# Altium PCB PCB2.PcbDoc
Units mil, origin at the board's own origin, x right, y up, seen from the top; angles counter-clockwise.
Board outline 3346.46 x 866.75 mil, 2 copper layers (Top Layer, Bottom Layer); 13 components, 12 nets, 38 pads, 32 vias.
Unrouted connection lines stored in the file: 8.
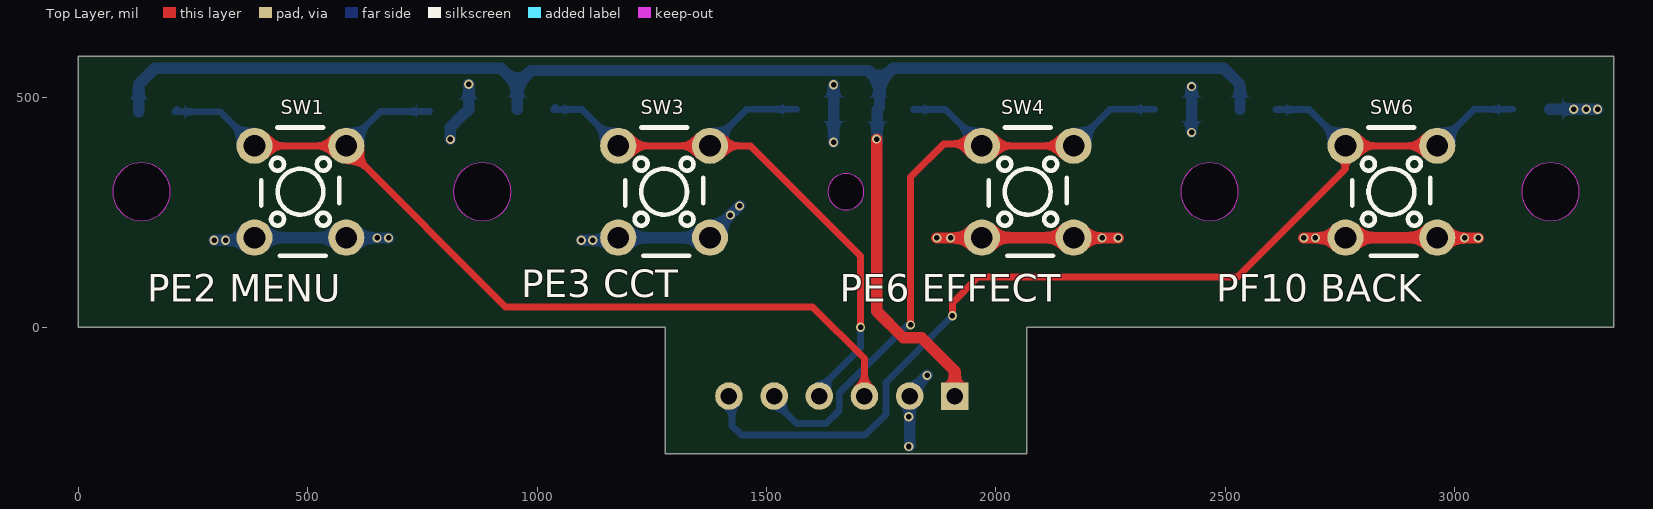
[diagram p0: Top Layer view]
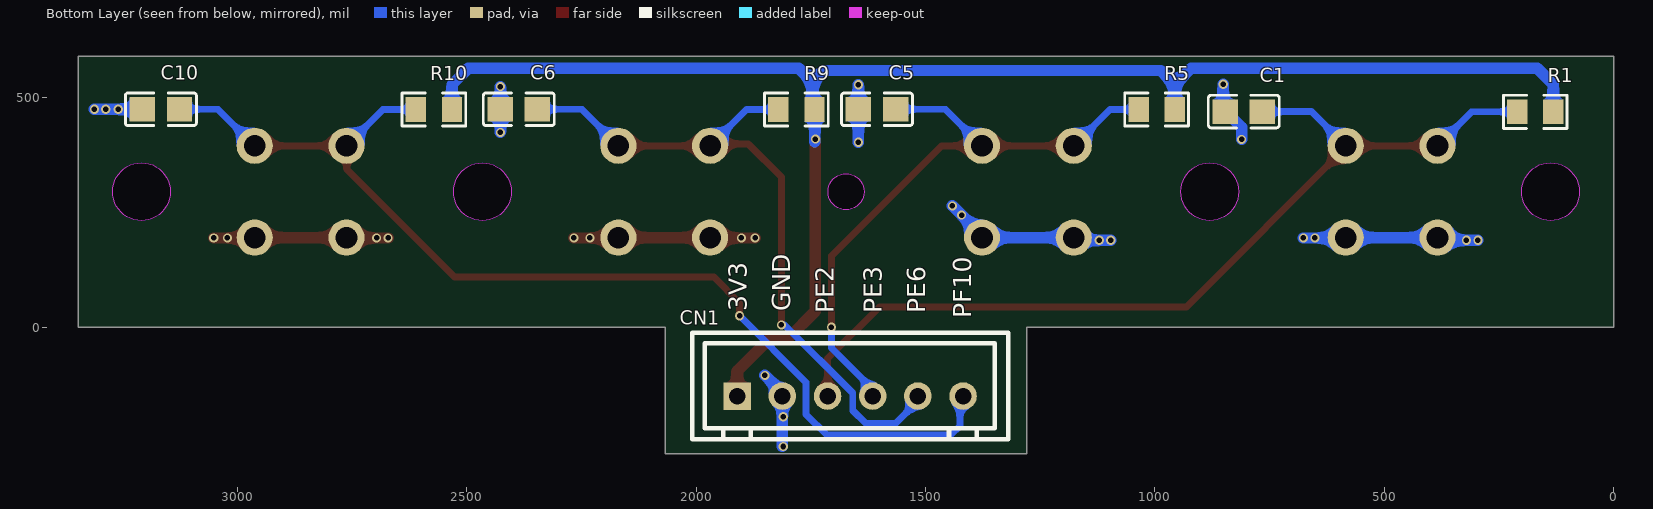
[diagram p1: Bottom Layer view, seen from below]

## Layer stack, top to bottom
Top Solder: solder mask 0.4, Solder Resist, Dk 3.5
Top Layer: signal copper 1.4
Dielectric 1: dielectric 12.6, FR-4, Dk 4.8
Bottom Layer: signal copper 1.4
Bottom Solder: solder mask 0.4, Solder Resist, Dk 3.5

## Board outline
0,0 0,590.55 3346.46,590.55 3346.46,0 2067.86,0 2066.75,-1.11 2066.75,-276.2 1279.35,-276.2 1279.35,0
cut-out: 3145.67,295.28 ccw(c3208.66,295.28) 3208.66,232.28 ccw(c3208.66,295.28) 3271.65,295.28 ccw(c3208.66,295.28) 3208.66,358.27 ccw(c3208.66,295.28)
cut-out: 2402.58,295.28 ccw(c2465.57,295.28) 2465.57,232.28 ccw(c2465.57,295.28) 2528.56,295.28 ccw(c2465.57,295.28) 2465.57,358.27 ccw(c2465.57,295.28)
cut-out: 1633.68,295.28 ccw(c1673.05,295.28) 1673.05,255.91 ccw(c1673.05,295.28) 1712.42,295.28 ccw(c1673.05,295.28) 1673.05,334.65 ccw(c1673.05,295.28)
cut-out: 817.54,295.28 ccw(c880.53,295.28) 880.53,232.28 ccw(c880.53,295.28) 943.52,295.28 ccw(c880.53,295.28) 880.53,358.27 ccw(c880.53,295.28)
cut-out: 137.8,232.28 ccw(c137.8,295.28) 200.79,295.28 ccw(c137.8,295.28) 137.8,358.27 ccw(c137.8,295.28) 74.8,295.28 ccw(c137.8,295.28)

## Design rules (kind name [scope] priority, off if disabled: settings)
Clearance [All] p1: gap=6 ignorepadtopadclearanceinfootprint=FALSE
ComponentClearance [All] p1: gap=6 collisioncheckmode=3 verticalgap=6 showdistances=FALSE
HoleSize [All] p1: absolutevalues=TRUE maxlimit=200 minlimit=1 maxpercent=80.000 minpercent=20.000
HoleToHoleClearance [All] p1: gap=0 allowstackedmicrovias=TRUE
MinimumSolderMaskSliver [All] p1: minsoldermaskwidth=0
PolygonConnect [All] p1: connectstyle=Direct reliefconductorwidth=10 reliefentries=4 polygonreliefangle="90 Angle" airgapwidth=10
RoutingVias [All] p1: holewidth=12 width=20 viastyle="Through Hole" minholewidth=12 minwidth=20 maxholewidth=28 maxwidth=50
SilkToSilkClearance [All] p1: silktosilkclearance=0
SilkToSolderMaskClearance [IsPad] p1: minsilkscreentomaskgap=0 clearancetoexposedcopper=TRUE
SolderMaskExpansion [All] p1: expansion=4 istentingtop=FALSE
Width [All] p1: maxlimit=100 minlimit=8 preferedwidth=10
24 further rules are at their usual default settings.

## Components (designator, comment, footprint, x,y, rotation, side; value= is the part's Value field where it differs from the comment)
C1 "100nF C0805" C0805 806.25,469.92 r180 bottom value=10uF
C5 "100nF C0805" C0805 1605.7,474.92 r180 bottom value=10uF
C6 "100nF C0805" C0805 2386.25,474.92 r180 bottom value=10uF
C10 "100nF C0805" C0805 3166.25,474.92 r180 bottom value=10uF
CN1 "XH2.56-1*6P直插" H2.54-1*6P-直插CONN-TH_6P-P2.50_HC-XH-6A-G 1664.22,-150 r180 bottom
R1 "10K R0805" R0805 171.25,469.39 r0 bottom value=10kΩ
R5 "10K R0805" R0805 996.25,474.39 r0 bottom value=10kΩ
R9 "10K R0805" R0805 1781.25,474.39 r0 bottom value=10kΩ
R10 "10K R0805" R0805 2571.25,474.39 r0 bottom value=10kΩ
SW1 "pb07" KEY-pb07-5.08*5.08 484.27,295.28 r0 top
SW3 "pb07" KEY-pb07-5.08*5.08 1276.79,295.28 r0 top
SW4 "pb07" KEY-pb07-5.08*5.08 2069.31,295.28 r0 top
SW6 "pb07" KEY-pb07-5.08*5.08 2861.83,295.28 r0 top

## Footprints (in the part's own frame and the unit in brackets; to place one, negate y for a bottom-side part, rotate by r counter-clockwise, add the part's x,y. Pads: shape width x height; smd on the part's side, far side on the other; paste and mask are expansions set on the pad)
C0805 [mm]
  rect 1.41x1.35 smd paste-100 mask+0.051: 1(-1.03,0) 2(1.03,0)
  silkscreen extent -1.96,-0.9 1.96,0.9
H2.54-1*6P-直插CONN-TH_6P-P2.50_HC-XH-6A-G [mil]
  rect 60x60 hole 36 paste+0 mask+1.97: 1(-246.07,0)
  round 60 hole 36 paste+0 mask+1.97: 2(-147.63,0) 3(-49.22,0) 4(49.22,0) 5(147.63,0) 6(246.07,0)
  silkscreen extent -344,-94 344,138
KEY-pb07-5.08*5.08 [mm]
  round 2 hole 1.2 paste+0 mask+0.051: 1(-2.54,2.54) 2(2.54,2.54) 3(-2.54,-2.54) 4(2.54,-2.54)
  silkscreen extent -2.16,-3.56 2.16,3.56
R0805 [mm]
  rect 1.133x1.377 smd paste-100 mask+0.051: 1(-1,0) 2(1,0)
  silkscreen extent -1.76,-0.92 1.76,0.92

## Part data
C1 C5 C6 C10: library part C0805, JLCPCB Part Class="Basic Part", LCSC Part Name="10uF ±10% 25V", Manufacturer=SAMSUNG(三?, Manufacturer Part=CL21A106KAYNNNE, Temperature Coefficient=X5R, Tolerance=±10%, Voltage Rated=25V, Add into BOM=yes, Convert to PCB=yes, Datasheet=https://atta.szlcsc.com/upload/public/pdf/source/20160103/1457707679302.pdf, Device=CL21A106KAYNNNE_C15850, Name=10uF, Supplier=LCSC, Supplier Footprint=0805, Supplier Part=C15850, Symbol=CL21A106KAYNNNE
CN1: Current Rating (Max)=3A, LCSC Part Name="XH 2.54mm 1x6P 弯?", Manufacturer=HCTL(华?, Manufacturer Part=HC-XH-6AW-G, Operating Temperature Range=-25℃~+85?, Add into BOM=yes, Convert to PCB=yes, Datasheet=https://atta.szlcsc.com/upload/public/pdf/source/20230105/4FFD2EFD3DA44AA828171A44400F3EDE.pdf, Device=HC-XH-6AW-G, Gender=公?, Mounting Style=弯?, Name=HC-XH-6AW-G, Number of PINs Per Row=6, Number of Rows=1, Pins Structure=1x6P, Pitch=2.54mm, Reference Series=XH, Row Spacing=2.54mm, Supplier=LCSC, Supplier Footprint=弯插,P=, Supplier Part=C5341212, Symbol=HC-XH-6AW-G
R1 R5 R9 R10: library part R0805, JLCPCB Part Class="Basic Part", LCSC Part Name="10KΩ ?", Manufacturer=UNI-ROYAL(厚?, Manufacturer Part=0805W8F1002T5E, Operating Temperature Range=-55℃~+155?, Overload Voltage (Max)=150V, Power(Watts)=1/8W, Temperature Coefficient=±100ppm/?, Tolerance=±1%, Add into BOM=yes, Convert to PCB=yes, Datasheet=https://atta.szlcsc.com/upload/public/pdf/source/20170920/C17414_1505887067106979773.pdf, Device=0805W8F1002T5E_C17414, Name=10kΩ, Supplier=LCSC, Supplier Footprint=0805, Supplier Part=C17414, Symbol=0805W8F1002T5E
SW1 SW3 SW4 SW6: "pb07无声轻触按键//东莞市荣硕电子", JLCPCB Part Class="Extended Part", LCSC Part Name=6*6*8.0四脚, Manufacturer=Yuandi(元?, Manufacturer Part=TS-1095PD-A9B3-D2, Add into BOM=yes, Convert to PCB=yes, Datasheet=https://atta.szlcsc.com/upload/public/pdf/source/20210520/C2834872_7B734042F4AFC186C436C08E153ADB00.pdf, Device=TS-1095PD-A9B3-D2, Name=TS-1095PD-A9B3-D2, Supplier=LCSC, Supplier Footprint=插件,6x, Supplier Part=C2834903, Symbol=TS-1095PD-A9B3-D2

## Via types
v1: diameter 20, hole 12, Top Layer to Bottom Layer, tented both sides, 32 vias

## Nets (pads, with @x,y where several pads share a name; then routed paths per layer and width w, separated by ;. In a path a pad name is that pad's centre, name@x,y a point inside that pad or via, vN(x,y) a via of type N, cw(c..) or ccw(c..) an arc to the next point about the centre after c; other vN are vias at no path point)
3V3: CN1.1 R1.1 R5.1 R9.1 R10.1 | length 3434.3
  Top Layer w25: v1(1740,410) 1740,35 1798.5,-23.5 1838.5,-23.5 1910.28,-95.28 CN1.1
  Bottom Layer w25: R1.1 131.88,529.39 166.88,564.39 921.25,564.39 956.88,528.76 ; R5.1 956.88,528.76 ; v1@1741.25,404.39 1741.25,473.76 R9.1 1746.25,478.76 1746.25,534.39 ; R10.1 2531.88,528.76 2496.25,564.39 1776.25,564.39 1746.25,534.39 ; 956.88,528.76 987.51,559.39 1721.25,559.39 1746.25,534.39
GND: C1.1 C5.1 C6.1 C10.1 CN1.2 SW1.3 SW1.4 SW3.3 SW3.4 SW4.3 SW4.4 SW6.3 SW6.4 | length 2170.8
  Top Layer w25: v1(1871.25,194.39) v1(1901.25,194.39) 1968.43,194.39 SW4.3 SW4.4 2170.2,194.39 v1(2231.25,194.39) v1(2266.25,194.39) ; v1(2671.25,194.39) v1(2696.25,194.39) 2760.95,194.39 SW6.3 SW6.4 2962.72,194.39 v1(3021.25,194.39) v1(3051.25,194.39)
  Bottom Layer w25: v1(296.25,189.39) v1(321.25,189.39) 378.39,189.39 SW1.3 SW1.4 585.16,194.39 v1(651.25,194.39) v1(676.25,194.39) ; v1(811.25,409.39) 811.25,435.55 845.62,469.92 C1.1 851.25,474.37 v1(851.25,529.39) ; v1(1096.25,189.39) v1(1121.25,189.39) 1170.91,189.39 SW3.3 SW3.4 1376.79,199.93 v1(1421.25,244.39) v1(1441.25,264.39) ; v1(1646.25,403.14) C5.1 v1(1646.25,528.39) ; v1@1811.85,-260 CN1.2@1811.85,-155 ; CN1.2 1811.85,-143.15 v1(1850,-105) ; v1(2426.25,424.39) v1(2426.25,524.39) ; C10.1 v1(3259.03,474.92) v1(3286.25,474.92) v1(3311.25,474.92)
  other v1: 1810,-260 1810,-195
PB4: 
PB5: 
PB6: 
PB7: 
PC4: 
PC5: 
PE2: C1.2 CN1.3 R1.2 SW1.1 SW1.2 | length 2030
  Top Layer w15: SW1.1 SW1.2 584.27,391.37 931.25,44.39 1600.61,44.39 1713.43,-68.44 CN1.3
  Bottom Layer w15: R1.2@215.62,474.39 R1.2 310.15,469.39 SW1.1 SW1.1@383.5,396.05 ; SW1.2 658.92,469.92 C1.2
PE3: C5.2 CN1.4 R5.2 SW3.1 SW3.2 | length 1383
  Top Layer w15: SW3.1 SW3.2 1465.37,395.28 1705,155.64 v1(1705,0)
  Bottom Layer w15: R5.2@1040.62,479.39 R5.2 1097.67,474.39 SW3.1 ; SW3.2@1384,402.49 SW3.2 1456.44,474.92 C5.2 ; CN1.4 1615,-135 1705,-45 v1(1705,0)
PE6: C6.2 CN1.5 R9.2 SW4.1 SW4.2 | length 1553
  Top Layer w15: v1(1813.89,5) 1813.89,327.03 1886.25,399.39 1965.2,399.39 SW4.1 SW4.2
  Bottom Layer w15: CN1.5@1516.59,-148.72 CN1.5 1516.59,-161.59 1565,-210 1630,-210 1658.5,-181.49 1658.5,-143.41 1806.92,5 v1(1813.89,5) ; R9.2 1890.19,474.39 SW4.1 ; SW4.2@2161.25,403.34 SW4.2 2248.96,474.92 C6.2
PF10: C10.2 CN1.6 R10.2 SW6.1 SW6.2 | length 2341.8
  Top Layer w15: v1(1905,25) 1905,53.14 1961.25,109.39 2526.25,109.39 2761.25,344.39 2761.25,394.7 SW6.1 SW6.2
  Bottom Layer w15: CN1.6 1418.15,-162.17 1425,-169.02 1425,-215 1445,-235 1715,-235 1760,-190 1760,-120 v1(1905,25) ; R10.2 2682.71,474.39 SW6.1 ; SW6.2 3041.48,474.92 C10.2

## Other copper
Top Layer:
  pour cut-out: 3094.1,295.28 ccw(c3208.66,295.28) 3208.66,180.71 ccw(c3208.66,295.28) 3323.22,295.28 ccw(c3208.66,295.28) 3208.66,409.84 ccw(c3208.66,295.28)
  pour cut-out: 2351.01,295.28 ccw(c2465.57,295.28) 2465.57,180.71 ccw(c2465.57,295.28) 2580.13,295.28 ccw(c2465.57,295.28) 2465.57,409.84 ccw(c2465.57,295.28)
  pour cut-out: 1618.75,295.28 ccw(c1673.05,295.28) 1673.05,240.97 ccw(c1673.05,295.28) 1727.35,295.28 ccw(c1673.05,295.28) 1673.05,349.58 ccw(c1673.05,295.28)
  pour cut-out: 765.97,295.28 ccw(c880.53,295.28) 880.53,180.71 ccw(c880.53,295.28) 995.09,295.28 ccw(c880.53,295.28) 880.53,409.84 ccw(c880.53,295.28)
  pour cut-out: 137.8,180.71 cw(c137.8,295.28) 23.23,295.28 cw(c137.8,295.28) 137.8,409.84 cw(c137.8,295.28) 252.36,295.28 cw(c137.8,295.28)
Bottom Layer:
  pour cut-out: 3094.1,295.28 ccw(c3208.66,295.28) 3208.66,180.71 ccw(c3208.66,295.28) 3323.22,295.28 ccw(c3208.66,295.28) 3208.66,409.84 ccw(c3208.66,295.28)
  pour cut-out: 2351.01,295.28 ccw(c2465.57,295.28) 2465.57,180.71 ccw(c2465.57,295.28) 2580.13,295.28 ccw(c2465.57,295.28) 2465.57,409.84 ccw(c2465.57,295.28)
  pour cut-out: 1618.75,295.28 ccw(c1673.05,295.28) 1673.05,240.97 ccw(c1673.05,295.28) 1727.35,295.28 ccw(c1673.05,295.28) 1673.05,349.58 ccw(c1673.05,295.28)
  pour cut-out: 765.97,295.28 ccw(c880.53,295.28) 880.53,180.71 ccw(c880.53,295.28) 995.09,295.28 ccw(c880.53,295.28) 880.53,409.84 ccw(c880.53,295.28)
  pour cut-out: 137.8,180.71 cw(c137.8,295.28) 23.23,295.28 cw(c137.8,295.28) 137.8,409.84 cw(c137.8,295.28) 252.36,295.28 cw(c137.8,295.28)

## Silkscreen, mask and mechanical layers (free items; w line width, h text height)
Top Overlay:
  text "PE3 CCT" at 965,65 h60
  text "PE2 MENU" at 150,55 h60
  text "PE6 EFFECT" at 1660,55 h60
  text "PF10 BACK" at 2480,55 h60
Bottom Overlay:
  text "GND" at 1795,35 h40 r270
  text "3V3" at 1890,35 h40 r270
  text "PE6" at 1500,30 h40 r270
  text "PE3" at 1595,30 h40 r270
  text "PE2" at 1700,30 h40 r270
  text "PF10" at 1400,20 h40 r270
Mechanical 1:
  circle w10: c3208.66,295.28 r62.99
  circle w10: c2465.57,295.28 r62.99
  circle w10: c880.53,295.28 r62.99
  circle w10: c137.8,295.28 r62.99
  circle w10: c1673.05,295.28 r39.37
  lines w10: 0,0 836.61,0 1279.35,0 1279.35,-276.2 1673.05,-276.2 2066.75,-276.2 2066.75,-1.11 2067.86,0 2509.84,0 3346.46,0 3346.46,590.55 0,590.55 0,0